# Altium PCB NANOEveryV3.0.PcbDoc
Units mm, origin at the board's own origin, x right, y up, seen from the top; angles counter-clockwise.
Board outline 43.18 x 17.78 mm, 4 copper layers (Top, PWR, MID, Bottom), stack 0.925 mm thick; 2 components, 0 nets, 64 pads, 0 vias.
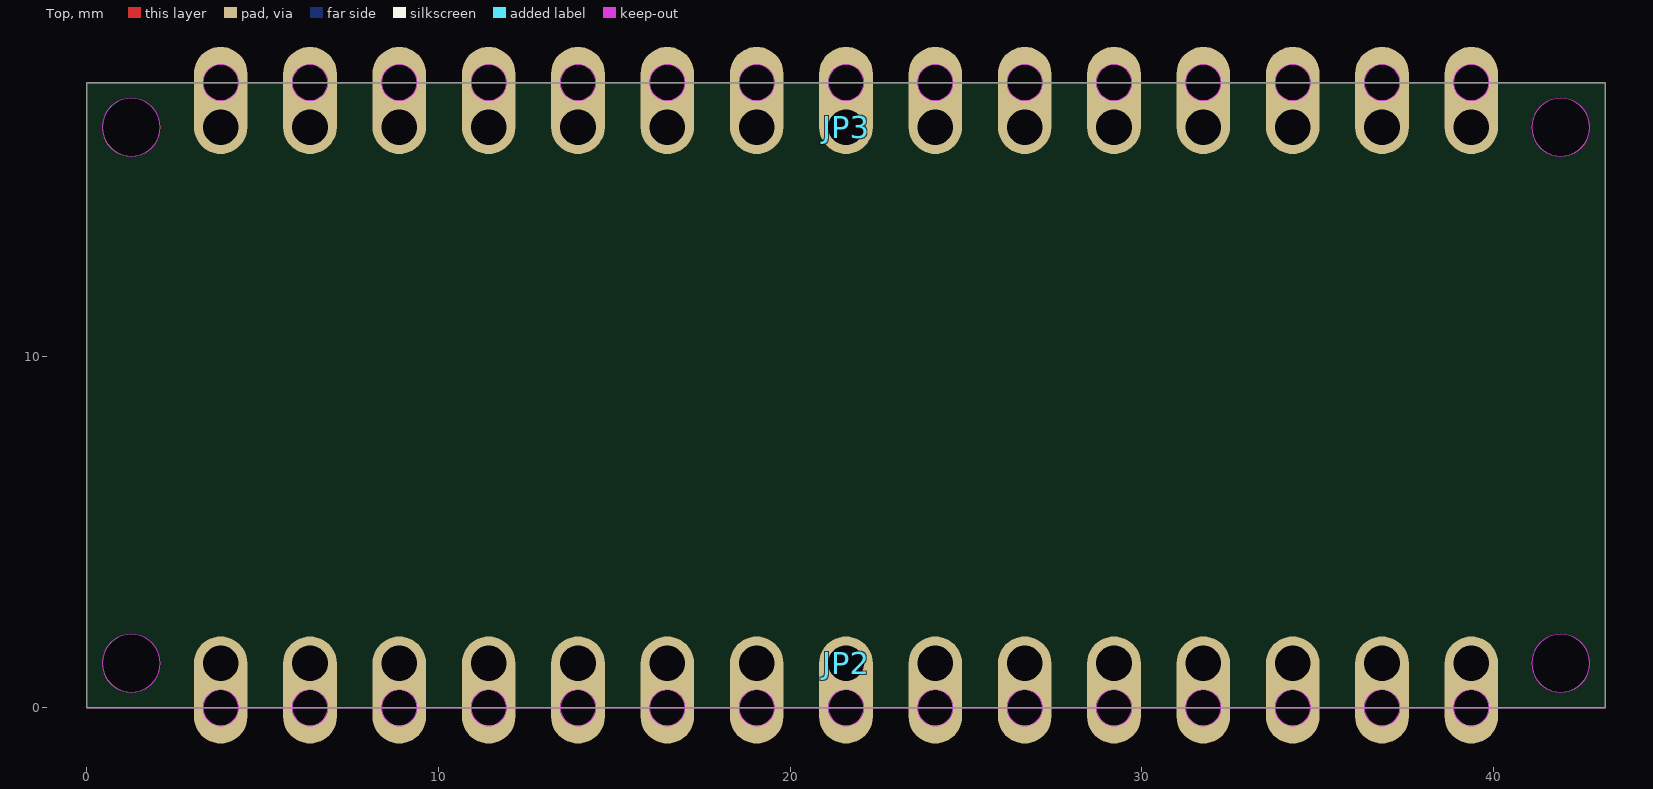
[diagram p0: Top view]
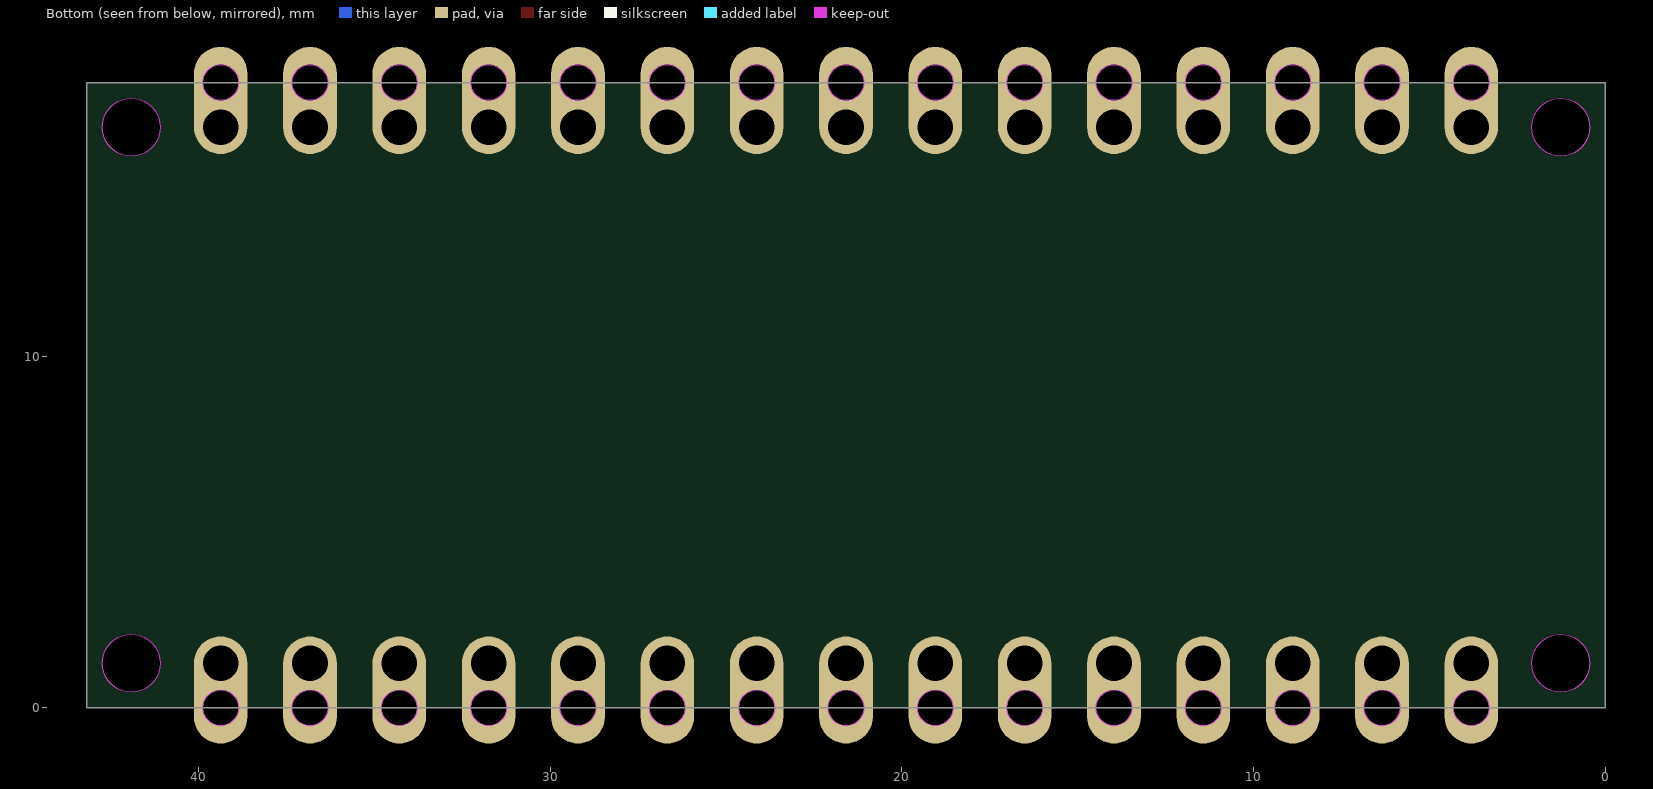
[diagram p1: Bottom view, seen from below]

## Layer stack, top to bottom
Top Solder: solder mask 0.0102, Solder Resist, Dk 3.5
Top: signal copper 0.035
Dielectric 1: core 0.2, FR-4, Dk 4.8
PWR: signal copper 0.0175
Dielectric3: core 0.3, FR-4, Dk 4.8
MID: signal copper 0.0175
Dielectric2: dielectric 0.32, FR-4, Dk 4.8
Bottom: signal copper 0.035
Bottom Solder: solder mask 0.0102, Solder Resist, Dk 3.5

## Board outline
43.18,0 0,0 0,17.78 43.18,17.78
cut-out: 41.91,0.445 ccw(c41.91,1.27) 42.735,1.27 ccw(c41.91,1.27) 41.91,2.095 ccw(c41.91,1.27) 41.084,1.27 ccw(c41.91,1.27)
cut-out: 41.91,15.684 ccw(c41.91,16.51) 42.735,16.51 ccw(c41.91,16.51) 41.91,17.335 ccw(c41.91,16.51) 41.084,16.51 ccw(c41.91,16.51)
cut-out: 1.27,15.684 ccw(c1.27,16.51) 2.095,16.51 ccw(c1.27,16.51) 1.27,17.335 ccw(c1.27,16.51) 0.445,16.51 ccw(c1.27,16.51)
cut-out: 1.27,0.445 ccw(c1.27,1.27) 2.095,1.27 ccw(c1.27,1.27) 1.27,2.095 ccw(c1.27,1.27) 0.445,1.27 ccw(c1.27,1.27)
cut-out: 13.97,17.272 ccw(c13.97,17.78) 14.478,17.78 ccw(c13.97,17.78) 13.97,18.288 ccw(c13.97,17.78) 13.462,17.78 ccw(c13.97,17.78)
cut-out: 16.51,17.272 ccw(c16.51,17.78) 17.018,17.78 ccw(c16.51,17.78) 16.51,18.288 ccw(c16.51,17.78) 16.002,17.78 ccw(c16.51,17.78)
cut-out: 19.05,17.272 ccw(c19.05,17.78) 19.558,17.78 ccw(c19.05,17.78) 19.05,18.288 ccw(c19.05,17.78) 18.542,17.78 ccw(c19.05,17.78)
cut-out: 11.43,17.272 ccw(c11.43,17.78) 11.938,17.78 ccw(c11.43,17.78) 11.43,18.288 ccw(c11.43,17.78) 10.922,17.78 ccw(c11.43,17.78)
cut-out: 3.81,17.272 ccw(c3.81,17.78) 4.318,17.78 ccw(c3.81,17.78) 3.81,18.288 ccw(c3.81,17.78) 3.302,17.78 ccw(c3.81,17.78)
cut-out: 6.35,17.272 ccw(c6.35,17.78) 6.858,17.78 ccw(c6.35,17.78) 6.35,18.288 ccw(c6.35,17.78) 5.842,17.78 ccw(c6.35,17.78)
cut-out: 8.89,17.272 ccw(c8.89,17.78) 9.398,17.78 ccw(c8.89,17.78) 8.89,18.288 ccw(c8.89,17.78) 8.382,17.78 ccw(c8.89,17.78)
cut-out: 21.59,17.272 ccw(c21.59,17.78) 22.098,17.78 ccw(c21.59,17.78) 21.59,18.288 ccw(c21.59,17.78) 21.082,17.78 ccw(c21.59,17.78)
cut-out: 34.29,17.272 ccw(c34.29,17.78) 34.798,17.78 ccw(c34.29,17.78) 34.29,18.288 ccw(c34.29,17.78) 33.782,17.78 ccw(c34.29,17.78)
cut-out: 36.83,17.272 ccw(c36.83,17.78) 37.338,17.78 ccw(c36.83,17.78) 36.83,18.288 ccw(c36.83,17.78) 36.322,17.78 ccw(c36.83,17.78)
cut-out: 39.37,17.272 ccw(c39.37,17.78) 39.878,17.78 ccw(c39.37,17.78) 39.37,18.288 ccw(c39.37,17.78) 38.862,17.78 ccw(c39.37,17.78)
cut-out: 31.75,17.272 ccw(c31.75,17.78) 32.258,17.78 ccw(c31.75,17.78) 31.75,18.288 ccw(c31.75,17.78) 31.242,17.78 ccw(c31.75,17.78)
cut-out: 24.13,17.272 ccw(c24.13,17.78) 24.638,17.78 ccw(c24.13,17.78) 24.13,18.288 ccw(c24.13,17.78) 23.622,17.78 ccw(c24.13,17.78)
cut-out: 26.67,17.272 ccw(c26.67,17.78) 27.178,17.78 ccw(c26.67,17.78) 26.67,18.288 ccw(c26.67,17.78) 26.162,17.78 ccw(c26.67,17.78)
cut-out: 29.21,17.272 ccw(c29.21,17.78) 29.718,17.78 ccw(c29.21,17.78) 29.21,18.288 ccw(c29.21,17.78) 28.702,17.78 ccw(c29.21,17.78)
cut-out: 29.21,-0.508 ccw(c29.21,0) 29.718,0 ccw(c29.21,0) 29.21,0.508 ccw(c29.21,0) 28.702,0 ccw(c29.21,0)
cut-out: 26.67,-0.508 ccw(c26.67,0) 27.178,0 ccw(c26.67,0) 26.67,0.508 ccw(c26.67,0) 26.162,0 ccw(c26.67,0)
cut-out: 24.13,-0.508 ccw(c24.13,0) 24.638,0 ccw(c24.13,0) 24.13,0.508 ccw(c24.13,0) 23.622,0 ccw(c24.13,0)
cut-out: 31.75,-0.508 ccw(c31.75,0) 32.258,0 ccw(c31.75,0) 31.75,0.508 ccw(c31.75,0) 31.242,0 ccw(c31.75,0)
cut-out: 39.37,-0.508 ccw(c39.37,0) 39.878,0 ccw(c39.37,0) 39.37,0.508 ccw(c39.37,0) 38.862,0 ccw(c39.37,0)
cut-out: 36.83,-0.508 ccw(c36.83,0) 37.338,0 ccw(c36.83,0) 36.83,0.508 ccw(c36.83,0) 36.322,0 ccw(c36.83,0)
cut-out: 34.29,-0.508 ccw(c34.29,0) 34.798,0 ccw(c34.29,0) 34.29,0.508 ccw(c34.29,0) 33.782,0 ccw(c34.29,0)
cut-out: 21.59,-0.508 ccw(c21.59,0) 22.098,0 ccw(c21.59,0) 21.59,0.508 ccw(c21.59,0) 21.082,0 ccw(c21.59,0)
cut-out: 8.89,-0.508 ccw(c8.89,0) 9.398,0 ccw(c8.89,0) 8.89,0.508 ccw(c8.89,0) 8.382,0 ccw(c8.89,0)
cut-out: 6.35,-0.508 ccw(c6.35,0) 6.858,0 ccw(c6.35,0) 6.35,0.508 ccw(c6.35,0) 5.842,0 ccw(c6.35,0)
cut-out: 3.81,-0.508 ccw(c3.81,0) 4.318,0 ccw(c3.81,0) 3.81,0.508 ccw(c3.81,0) 3.302,0 ccw(c3.81,0)
cut-out: 11.43,-0.508 ccw(c11.43,0) 11.938,0 ccw(c11.43,0) 11.43,0.508 ccw(c11.43,0) 10.922,0 ccw(c11.43,0)
cut-out: 19.05,-0.508 ccw(c19.05,0) 19.558,0 ccw(c19.05,0) 19.05,0.508 ccw(c19.05,0) 18.542,0 ccw(c19.05,0)
cut-out: 16.51,-0.508 ccw(c16.51,0) 17.018,0 ccw(c16.51,0) 16.51,0.508 ccw(c16.51,0) 16.002,0 ccw(c16.51,0)
cut-out: 13.97,-0.508 ccw(c13.97,0) 14.478,0 ccw(c13.97,0) 13.97,0.508 ccw(c13.97,0) 13.462,0 ccw(c13.97,0)

## Design rules (kind name [scope] priority, off if disabled: settings)
BoardOutlineClearance mdCopperDimension [All] p1: gap=0.254 ignorepadtopadclearanceinfootprint=FALSE except(0: Arc-SplitContinuation Track-SplitContinuation SMDPad-SplitContinuation THPad-SplitContinuation Via-SplitContinuation Fill-SplitContinuation Poly-SplitContinuation Region-SplitContinuation Text-SplitContinuation)
Clearance "Clearance (Same Net)" [All] p1: gap=0.203 ignorepadtopadclearanceinfootprint=FALSE
Clearance Clearance_for_NetClass_usb [InNetClass('usb') vs InNetClass('usb')] p2: gap=0.127 ignorepadtopadclearanceinfootprint=FALSE
Clearance [All] p3: gap=0.203 ignorepadtopadclearanceinfootprint=FALSE
HoleSize HoleSize_For_NetClass_usb [InNetClass('usb')] p1: absolutevalues=TRUE maxlimit=0.19 minlimit=0.19 maxpercent=80.000 minpercent=20.000
HoleSize [All] p2: absolutevalues=TRUE maxlimit=2540 minlimit=0.19 maxpercent=80.000 minpercent=20.000
HoleToHoleClearance mdDrill [All] p1: gap=0.203 allowstackedmicrovias=TRUE
MinimumSolderMaskSliver [All] p1 off: minsoldermaskwidth=0.254
PasteMaskExpansion Expansion_SMDPaste_OFF [InPadClass('SMDPaste_OFF')] p1: expansion=0
PasteMaskExpansion mlMinCreamFrame [All] p2: expansion=0
PolygonConnect PolygonConnect_For_PolygonThermal_ON_Width100000_Gap100000 [InPolygonClass('PolygonThermal_ON_Width100000_Gap100000') vs Not IsVia] p1: connectstyle=Relief reliefconductorwidth=0.254 reliefentries=4 polygonreliefangle="90 Angle" airgapwidth=0.254
PolygonConnect PolygonConnect_For_PolygonThermal_OFF [InPolygonClass('PolygonThermal_OFF')] p2: connectstyle=Direct reliefconductorwidth=0.254 reliefentries=4 polygonreliefangle="90 Angle" airgapwidth=0.254
PolygonConnect ThermalVias [IsVia] p3: connectstyle=Direct reliefconductorwidth=0.254 reliefentries=4 polygonreliefangle="90 Angle" airgapwidth=0.254
PolygonConnect [All] p4: connectstyle=Relief reliefconductorwidth=0.254 reliefentries=4 polygonreliefangle="90 Angle" airgapwidth=0.254
RoutingVias [All] p1: holewidth=0.19 width=0.393 viastyle="Through Hole" minholewidth=0.19 minwidth=0.393 maxholewidth=2.54 maxwidth=2.54
SolderMaskExpansion Expansion_SMDSolder_OFF [InPadClass('SMDSolder_OFF')] p1: expansion=0 istentingtop=FALSE
SolderMaskExpansion mlMinStopFrame [All] p2: expansion=0.102 istentingtop=FALSE
Width Width_For_NetClass_usb [InNetClass('usb')] p1: maxlimit=0.254 minlimit=0.19 preferedwidth=0.19
Width [All] p2: maxlimit=0.254 minlimit=0.203 preferedwidth=0.203
26 further rules are at their usual default settings.

## Classes and differential pairs
pad class SMDSolder_OFF: U1-EP
pad class SMDPaste_OFF: U1-EP

## Components (designator, comment, footprint, x,y, rotation, side; value= is the part's Value field where it differs from the comment)
JP2 "" 1X15-CASTELL 21.59,1.27 r0 top
JP3 "" 1X15-CASTELL 21.59,16.51 r180 top

## Footprints (in the part's own frame and the unit in brackets; to place one, negate y for a bottom-side part, rotate by r counter-clockwise, add the part's x,y. Pads: shape width x height; smd on the part's side, far side on the other; paste and mask are expansions set on the pad)
1X15-CASTELL [mil] "1X15-CASTELL"
  oval 60x120 hole 40 copper offset 0,-30: 1(-700,0) 2(-600,0) 3(-500,0) 4(-400,0) 5(-300,0) 6(-200,0) 7(-100,0) 8(0,0) 9(100,0) 10(200,0) 11(300,0) 12(400,0) 13(500,0) 14(600,0) 15(700,0)
  body extent -730,-90 730,30, height 150

## Part data
JP2 JP3: library part PINHD-1X15-CASTELLATED, "PIN HEADER", MANUFACTURER=-, CODE-ARDUINO=0646, DATASHEET=-, DeviceName=-CASTELLATED, DeviceSetName=PINHD-1X15, DISTRIBUTOR-LINK=-, DISTRIBUTOR-PN=-, GateName_1=A, LibraryName=Arduino-connectors, MANUFACTURER-PN=-, NOTE=DNM, SymbolName_1=ARDUINO-CONNECTORS_PINHD15

## Free pads (board coordinates)
  round 1.651 hole 1.651 unplated: MH1(1.27,16.51) MH2(1.27,1.27) MH3(41.91,1.27) MH4(41.91,16.51)
  round 1.016 hole 1.016 unplated: MH1(3.81,17.78) MH1(39.37,0) MH2(6.35,17.78) MH2(36.83,0) MH3(8.89,17.78) MH3(34.29,0) MH4(11.43,17.78) MH4(31.75,0) MH5(13.97,17.78) MH5(29.21,0) MH6(16.51,17.78) MH6(26.67,0) MH7(19.05,17.78) MH7(24.13,0) MH8(21.59,0) MH8(21.59,17.78) MH9(19.05,0) MH9(24.13,17.78) MH10(16.51,0) MH10(26.67,17.78) MH11(13.97,0) MH11(29.21,17.78) MH12(11.43,0) MH12(31.75,17.78) MH13(8.89,0) MH13(34.29,17.78) MH14(6.35,0) MH14(36.83,17.78) MH15(3.81,0) MH15(39.37,17.78)

## Nets (pads, with @x,y where several pads share a name; then routed paths per layer and width w, separated by ;. In a path a pad name is that pad's centre, name@x,y a point inside that pad or via, vN(x,y) a via of type N, cw(c..) or ccw(c..) an arc to the next point about the centre after c; other vN are vias at no path point)
pads on no net: JP2.1 JP2.2 JP2.3 JP2.4 JP2.5 JP2.6 JP2.7 JP2.8 JP2.9 JP2.10 JP2.11 JP2.12 JP2.13 JP2.14 JP2.15 JP3.1 JP3.2 JP3.3 JP3.4 JP3.5 JP3.6 JP3.7 JP3.8 JP3.9 JP3.10 JP3.11 JP3.12 JP3.13 JP3.14 JP3.15

## Keep-outs
Keep-Out Layer:
  lines w0.01: 0,0 43.18,0 ; 0,17.78 43.18,17.78

## Silkscreen, mask and mechanical layers (free items; w line width, h text height)
Dimension:
  lines w0.01: 0,0 43.18,0 ; 0,17.78 43.18,17.78
test-probe:
  circle w0.61: c27.385,14.725 r0.2
  circle w0.61: c24.845,14.725 r0.2
  circle w0.61: c27.385,10.345 r0.2
  circle w0.61: c24.845,10.345 r0.2
  circle w0.61: c22.305,10.345 r0.2
  circle w0.61: c8.105,11.645 r0.2
  circle w0.61: c8.105,13.945 r0.2
  circle w0.61: c5.705,13.945 r0.2
  circle w0.61: c5.705,11.645 r0.2
  circle w0.61: c14.1,7.945 r0.2
  circle w0.61: c16.505,7.945 r0.2
  text "5V" at 23.05,25.6 h2.76 r90
  text "VIN(5V)" at 25.59,25.6 h2.76 r90
  text "VCC" at 28.13,25.6 h2.76 r90
  text "GND" at 30.67,25.6 h2.76 r90
  text "RESET" at 33.21,25.6 h2.76 r90
  text "14" at 35.75,25.6 h2.76 r90
  text "13" at 38.29,25.6 h2.76 r90
  text "12" at 40.83,25.6 h2.76 r90
  text "11" at 43.37,25.6 h2.76 r90
  text "10" at 45.91,25.6 h2.76 r90
  text "9" at 48.45,25.6 h2.76 r90
  text "8" at 50.99,25.6 h2.76 r90
  text "7" at 53.53,25.6 h2.76 r90
  text "6" at 56.07,25.6 h2.76 r90
  text "SWCLK" at 25.59,15.44 h2.76 r90
  text "SWDIO" at 28.13,15.44 h2.76 r90
  text "USB_5V" at 6,14.8 h2.76 r90
  text "USB_D-" at 9.1,14.7 h2.76 r90
  text "BATT+" at 14.9,8.6 h2.76 r90
  text "BATT-" at 17.4,8.6 h2.76 r90
  text "VTG" at 27.843,5.253 h2.76 r90
  text "JRST" at 25.303,4.05 h2.76 r90
  text "JGND" at 22.763,3.981 h2.76 r90
  text "USB_D+" at 9.1,1.1 h2.76 r90
  text "USB_GND" at 6.2,-1.3 h2.76 r90
  text "4" at 53.38,-1.612 h2.76 r90
  text "0" at 43.22,-1.616 h2.76 r90
  text "1" at 45.78,-1.616 h2.76 r90
  text "2" at 48.336,-1.664 h2.76 r90
  text "3" at 50.84,-1.684 h2.76 r90
  text "5" at 55.885,-1.684 h2.76 r90
  text "A0" at 25.44,-3.313 h2.76 r90
  text "A1" at 28,-3.313 h2.76 r90
  text "A2" at 30.556,-3.292 h2.76 r90
  text "A4" at 35.6,-3.291 h2.76 r90
  text "A3" at 33.06,-3.342 h2.76 r90
  text "A5" at 38.105,-3.342 h2.76 r90
  text "A6" at 40.68,-3.371 h2.76 r90
  text "AREF" at 22.8,-6.395 h2.76 r90

## Dimensions
0,22.75 to 67.6,22.75 on tFinish